# Altium PCB MotionControlBoard.PcbDoc
Units mil, origin at the board's own origin, x right, y up, seen from the top; angles counter-clockwise.
Board outline 3935 x 2660 mil, 2 copper layers (Top Layer, Bottom Layer), stack 21 mil thick; 72 components, 65 nets, 270 pads, 170 vias.
Unrouted connection lines stored in the file: 2.
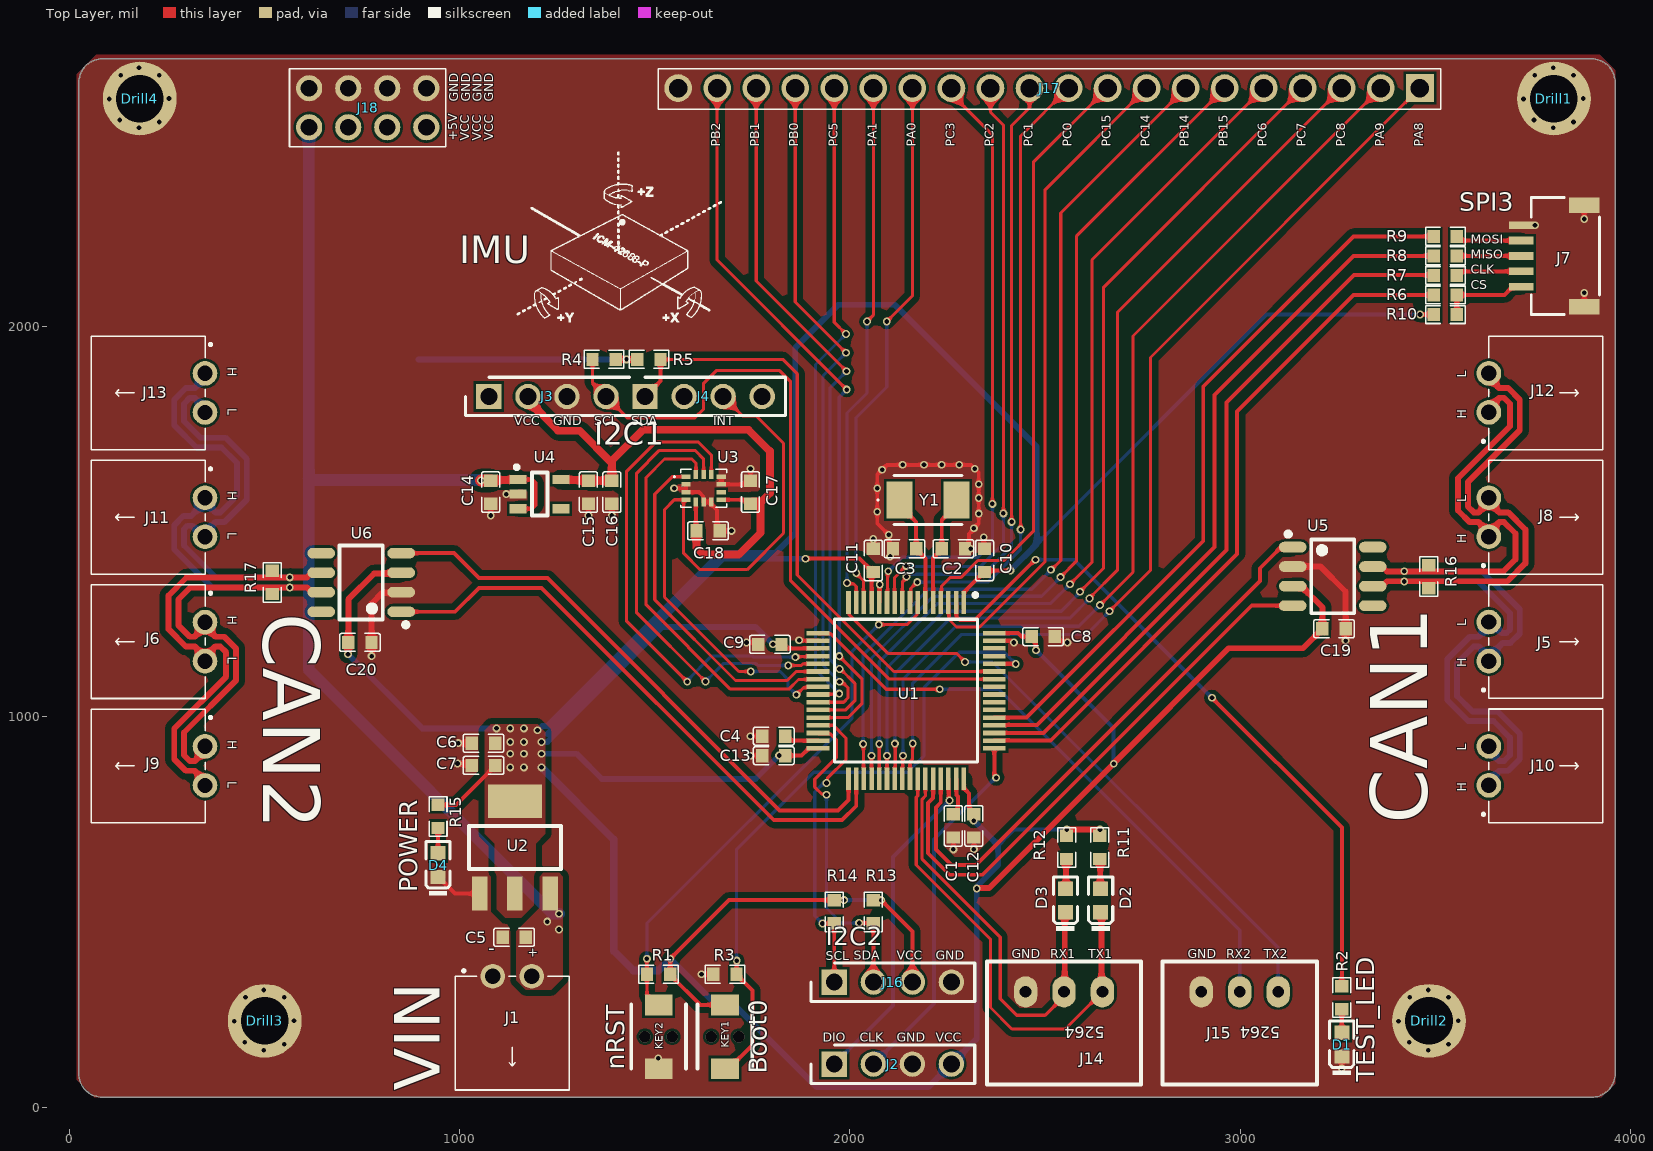
[diagram p0: Top Layer view]
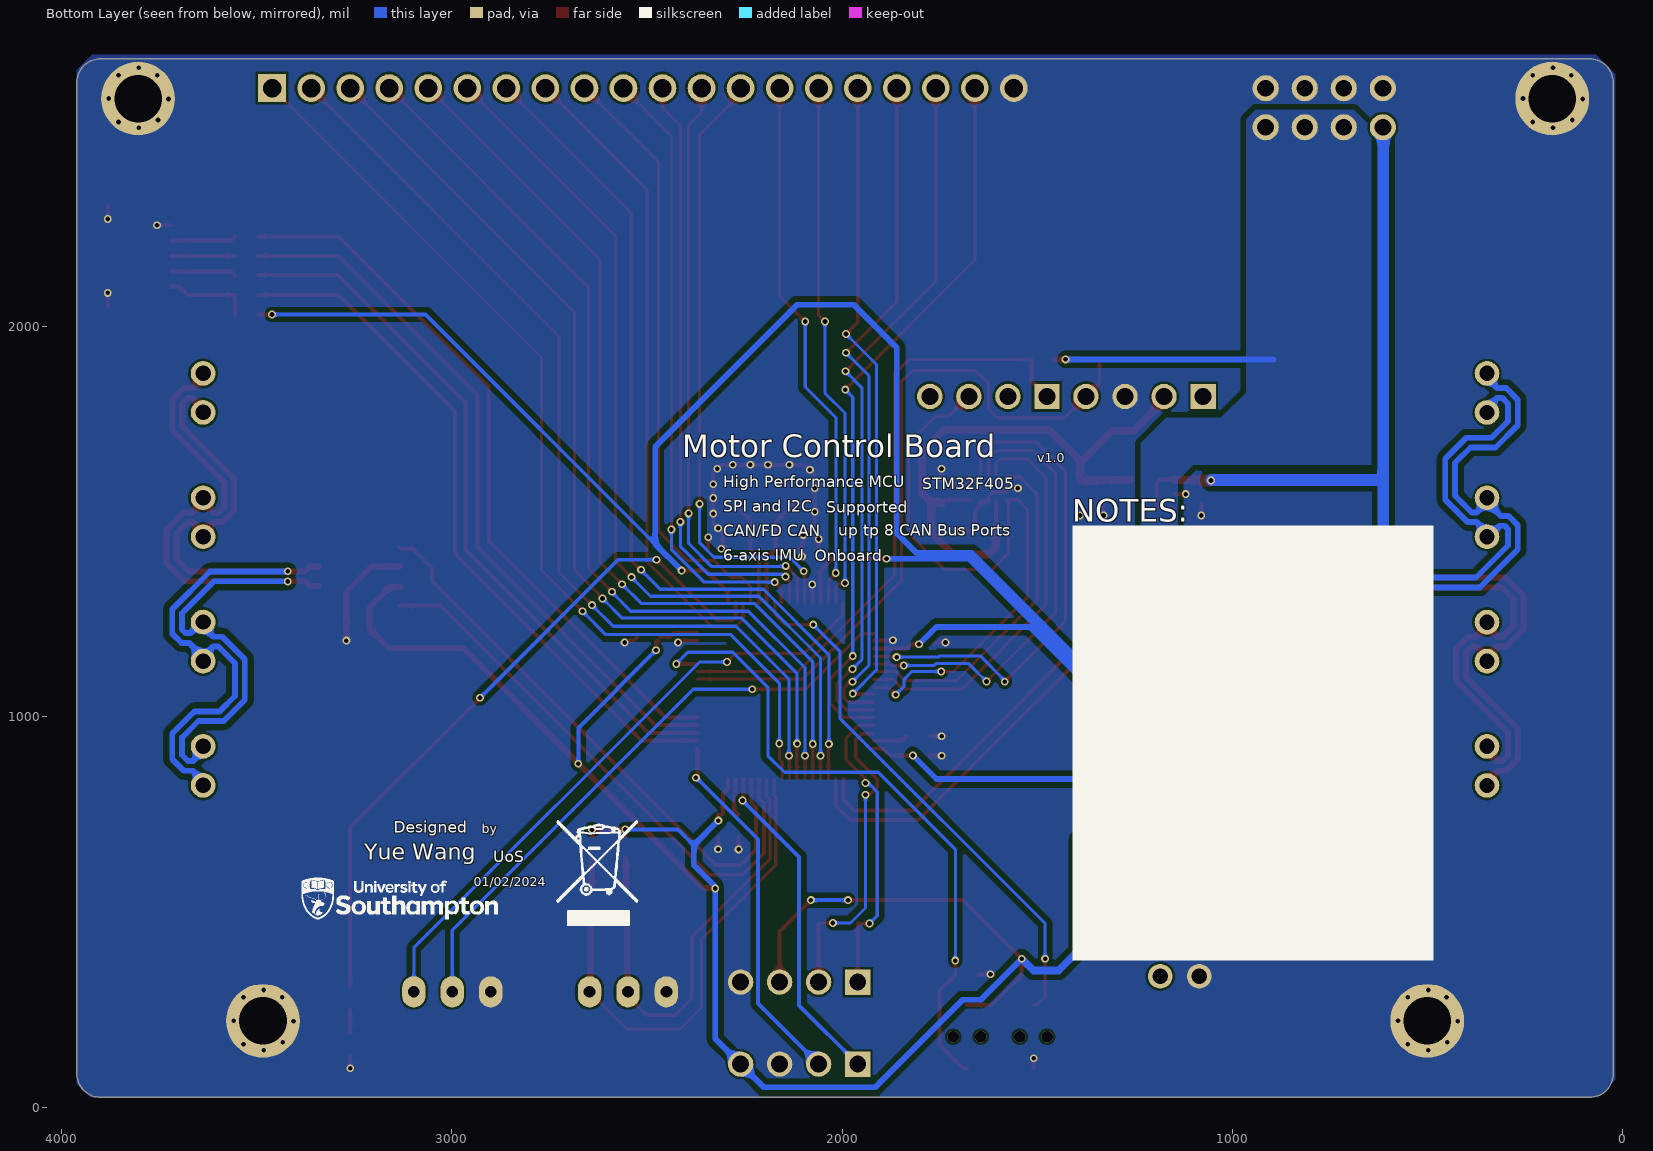
[diagram p1: Bottom Layer view, seen from below]
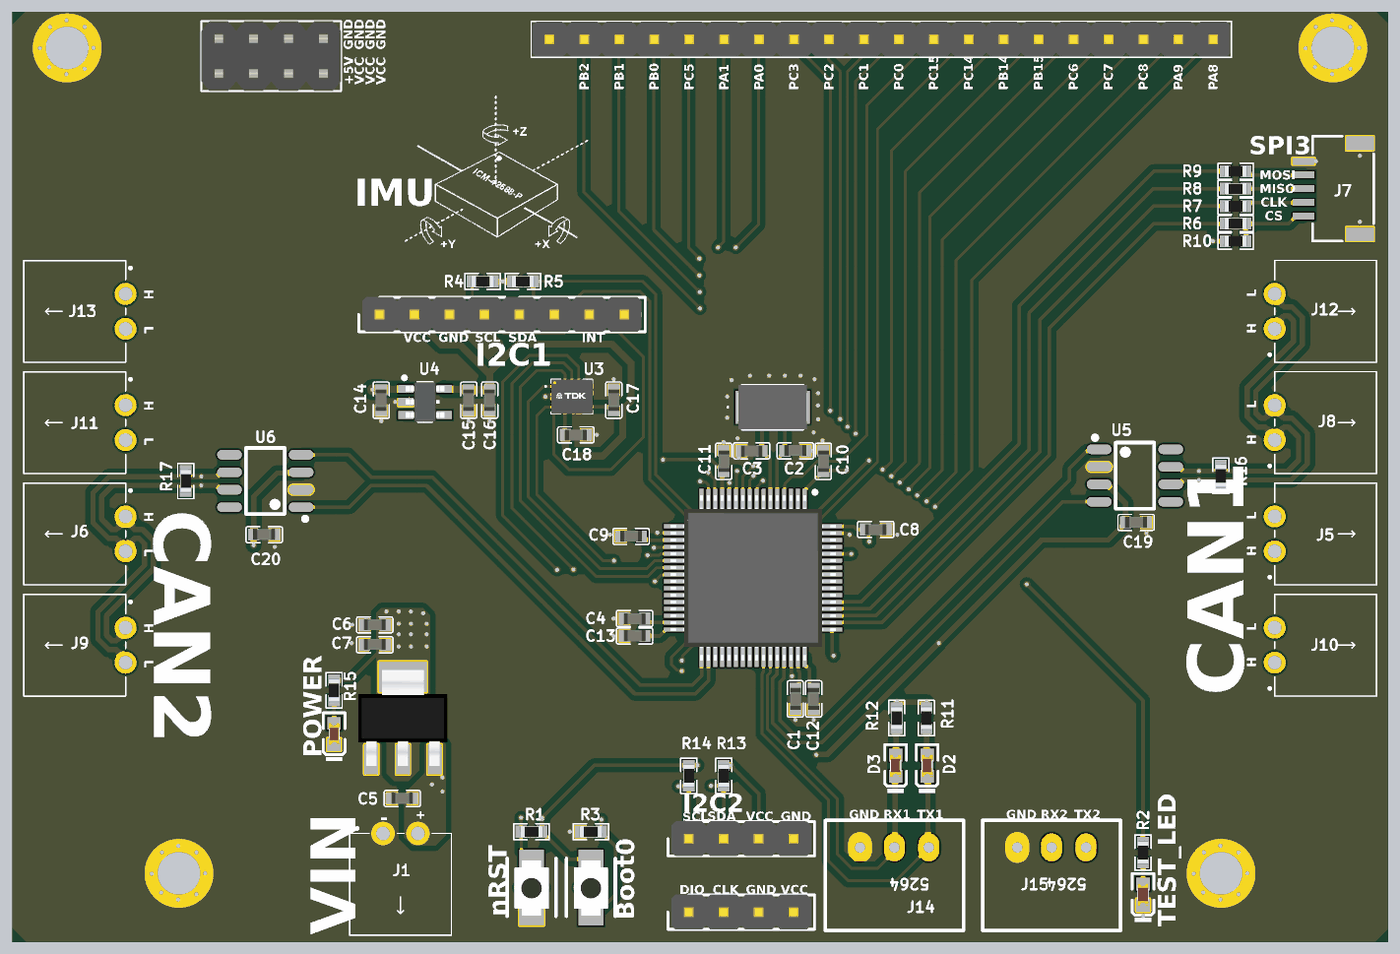
[diagram p2: 3D render of the assembled board from above, using the file's embedded part models]

## Layer stack, top to bottom
Top Solder: solder mask 0.4, Solder Resist, Dk 3.5
Top Layer: signal copper 1.4
Dielectric 2: prepreg 2.8, PP-006, Dk 4.1
Dielectric 1: dielectric 12.6, FR-4, Dk 4.8
Dielectric 3: prepreg 2.8, PP-006, Dk 4.1
Bottom Layer: signal copper 1.4
Board Layer Stack Bottom Solder: solder mask 0.4, Solder Resist, Dk 3.5

## Board outline
25,85 25,2625 cw(c85,2625) 85,2685 3900,2685 cw(c3900,2625) 3960,2625 3960,85 cw(c3900,85) 3900,25 85,25 cw(c85,85)

## Design rules (kind name [scope] priority, off if disabled: settings)
Clearance [All] p1: gap=6 ignorepadtopadclearanceinfootprint=FALSE except(15: Track-Poly Poly-Poly)
DiffPairsRouting [All] p1: maxlimit=10 minlimit=10 mostfreqgap=10 toplayer_minwidth=15 toplayer_maxwidth=15 toplayer_prefwidth=15 bottomlayer_minwidth=15 bottomlayer_maxwidth=15 bottomlayer_prefwidth=15 maxuncoupledlength=500
MinimumSolderMaskSliver [All] p1: minsoldermaskwidth=4
PlaneConnect [All] p1: planeconnectstyle=Direct reliefexpansion=20 reliefentries=4 reliefconductorwidth=10 reliefairgap=10
PolygonConnect [All] p1: connectstyle=Direct reliefconductorwidth=10 reliefentries=4 polygonreliefangle="90 Angle" airgapwidth=10
RoutingVias [All] p1: holewidth=12 width=20 viastyle="Through Hole" minholewidth=12 minwidth=20 maxholewidth=80 maxwidth=100
SilkToSilkClearance [All] p1: silktosilkclearance=0
SilkToSolderMaskClearance [IsPad] p1: minsilkscreentomaskgap=2 clearancetoexposedcopper=TRUE
SolderMaskExpansion [All] p1: expansion=4 istentingtop=FALSE
Width [All] p1: maxlimit=100 minlimit=6 preferedwidth=10
25 further rules are at their usual default settings.

## Classes and differential pairs
differential pair class CAN: CAN1 CAN2
net class CAN: CAN1_H CAN1_L CAN1_RX CAN1_TX CAN2_H CAN2_L CAN2_RX CAN2_TX
component class Peripherals: C19 C20 D2 D3 Drill1 Drill2 Drill3 Drill4 J5 J6 J7 J8 J9 J10 J11 J12 J13 J14 J15 J16 J17 J18 R6 R7 R8 R9 R10 R11 R12 R13 R14 R17 U5 U6
component class IMU: C14 C15 C16 C17 C18 J3 J4 R4 R5 U3 U4
component class Core: C1 C2 C3 C4 C5 C6 C7 C8 C9 C10 C11 C12 C13 D1 D4 J1 J2 KEY1 KEY2 R1 R2 R3 R15 U1 U2 Y1
differential pair CAN2: +CAN2_H -CAN2_L
differential pair CAN1: +CAN1_H -CAN1_L

## Components (designator, comment, footprint, x,y, rotation, side; value= is the part's Value field where it differs from the comment)
C1 "2.2uF" C0603 2265,720 r270 top
C2 "20pF" C0603 2265,1430 r0 top
C3 "20pF" C0603 2140,1430 r180 top
C4 "2.2uF" C0603 1805,950 r180 top
C5 "0.1uF" C0603 1140,435 r0 top
C6 "1uF" C0603 1061.49,931.8 r0 top
C7 "0.1uF" C0603 1061.49,875 r0 top
C8 "0.1uF" C0603 2495,1205 r180 top
C9 "0.1uF" C0603 1795,1185 r0 top
C10 "0.1uF" C0603 2345,1400 r270 top
C11 "0.1uF" C0603 2060,1400 r270 top
C12 "0.1uF" C0603 2317.53,720.09 r90 top
C13 "0.1uF" C0603 1805,900 r0 top
C14 "1uF" C0603 1080,1575 r90 top
C15 "1uF" C0603 1330.33,1575 r90 top
C16 "0.1uF" C0603 1390.33,1575 r90 top
C17 "0.1uF" C0603 1745.33,1575 r270 top
C18 "10nF" C0603 1636.67,1475.77 r180 top
C19 "0.1uF" C0603 3240,1225 r0 top
C20 "0.1uF" C0603 745,1190 r0 top
D1 "LED" 0603_LED_S1 3260,160 r90 top
D2 "LED" 0603_LED_S1 2642.22,529.04 r90 top
D3 "LED" 0603_LED_S1 2552.15,529.04 r90 top
D4 "LED" 0603_LED_S1 945,619.68 r90 top
Drill1 "Drill_M3" Drill_M_3 3803.2,2583.05 r270 top
Drill2 "Drill_M3" Drill_M_3 3483.32,220.84 r270 top
Drill3 "Drill_M3" Drill_M_3 501.04,220.84 r270 top
Drill4 "Drill_M3" Drill_M_3 181.16,2583.05 r270 top locked
J1 "XH_2.54mm_1x2P" XH2.54mm1x2P弯插 1135,335 r0 top
J2 "Header1x4" "Header 1x4p" 1960,110 r0 top
J3 "Header1x4" "Header 1x4p" 1075.33,1820 r0 top
J4 "Header1x4" "Header 1x4p" 1475.33,1820 r0 top
J5 "XH_2.54mm_1x2P" XH2.54mm1x2P弯插 3636.73,1192.29 r90 top
J6 "XH_2.54mm_1x2P" XH2.54mm1x2P弯插 348.27,1192.18 r270 top
J7 "1*5P" 1.0T-5P 3880,2050 r90 top
J8 "XH_2.54mm_1x2P" XH2.54mm1x2P弯插 3636.73,1510.72 r90 top
J9 "XH_2.54mm_1x2P" XH2.54mm1x2P弯插 348.27,873.75 r270 top
J10 "XH_2.54mm_1x2P" XH2.54mm1x2P弯插 3636.73,873.85 r90 top
J11 "XH_2.54mm_1x2P" XH2.54mm1x2P弯插 348.27,1510.62 r270 top
J12 "XH_2.54mm_1x2P" XH2.54mm1x2P弯插 3636.73,1829.16 r90 top
J13 "XH_2.54mm_1x2P" XH2.54mm1x2P弯插 348.27,1829.06 r270 top
J14 "5263-3AW" 5264-3AW 2548.43,291.35 r180 top
J15 "5263-3AW" 5264-3AW 2998.43,291.35 r180 top
J16 "Header1x4" "Header 1x4p" 1960,320 r0 top
J17 "Header1x20" Header1x20 2510,2610 r180 top
J18 "Header2*4" Header2*4 765,2559.61 r0 top
KEY1 "BOOT" KEY_3*4 1680,98.31 r90 top
KEY2 "nRST" KEY_3*4 1510,98.31 r90 top
R1 "10kΩ" R0603 1510,340 r0 top
R2 "330Ω" R0603 3260,280 r270 top
R3 "10kΩ" R0603 1680,340 r0 top
R4 "2.2kΩ" R0603 1370.33,1915 r0 top
R5 "2.2kΩ" R0603 1485.33,1915 r180 top
R6 "22Ω" R0603 3525,2080 r180 top
R7 "22Ω" R0603 3525,2130 r180 top
R8 "22Ω" R0603 3525,2180 r180 top
R9 "22Ω" R0603 3525,2230 r180 top
R10 "22Ω" R0603 3525,2030 r180 top
R11 "2.2kΩ" R0603 2640,665 r270 top
R12 "2.2kΩ" R0603 2555,665 r270 top
R13 "2.2kΩ" R0603 2060,500 r90 top
R14 "2.2kΩ" R0603 1960,500 r90 top
R15 "330Ω" R0603 945,744.37 r270 top
R16 "120Ω" R0603 3482.71,1358.33 r270 top
R17 "120Ω" R0603 520.39,1343.67 r90 top
U1 "STM32F405RGT6" QFP50P1200X1200X160-64N 2144.09,1066.42 r270 top
U2 "AMS1117-3.3" SOT-223 1140,665 r90 top
U3 "ICM-42688-P" IIM42352 1625.33,1585 r0 top
U4 "ME6211C33M5G-N" SOT-23-5 1205.33,1570 r180 top
U5 "SN65HVD232DR" SOIC-8_150mil 3236.25,1359.23 r270 top
U6 "SN65HVD232DR" SOIC-8_150mil 748.75,1343.67 r90 top
Y1 "8MHz ±10ppm 20pF YSX530GA" X503212MSB2GI 2200,1555 r0 top

## Footprints (in the part's own frame and the unit in brackets; to place one, negate y for a bottom-side part, rotate by r counter-clockwise, add the part's x,y. Pads: shape width x height; smd on the part's side, far side on the other; paste and mask are expansions set on the pad)
1.0T-5P [mm]
  rect 1x2 smd: 0(0.002,-0.018) 0(6.602,-0.018)
  rect 0.5x1.6 smd: 1(1.302,4.082) 2(2.302,4.082) 3(3.302,4.082) 4(4.302,4.082) 5(5.302,4.082)
  silkscreen extent -0.51,-1.02 7.11,3.43
0603_LED_S1 [mm]
  rect 0.93x0.98 smd: A(0.77,0) K(-0.77,0)
  silkscreen extent -1.97,-0.79 1.54,0.79, body extent -0.8,-0.4 0.8,0.4, height 0.6
5264-3AW [mil]
  oval 60x80 hole 30: 1(-98.42,-3.65) 2(0,-3.65) 3(98.43,-3.65)
  silkscreen extent -198,-81 198,234
C0603 [mil]
  rect 31.73x34.02 smd mask+2.01: 1(-29.67,0) 2(29.67,0)
  silkscreen extent -52,-23 52,23, body extent -31,-15 31,16, height 18
Drill_M_3 [mm]
  round 4.8 hole 3.1: 0(0,0)
Header1x20 [mil]
  rect 70.91x70.91 hole 47.2 mask+2.01: 1(-950,0)
  round 70.91 hole 47.2 mask+2.01: 2(-850,0) 3(-750,0) 4(-650,0) 5(-550,0) 6(-450,0) 7(-350,0) 8(-250,0) 9(-150,0) 10(-50,0) 11(50,0) 12(150,0) 13(250,0) 14(350,0) 15(450,0) 16(550,0) 17(650,0) 18(750,0) 19(850,0) 20(950,0)
  silkscreen extent -1003,-50 1001,54, body extent -1001,-47 999,53, height 335
Header2*4 [mm]
  round 1.699 hole 1.1: 1(-3.81,-1.27) 2(-3.81,1.27) 3(-1.27,-1.27) 4(-1.27,1.27) 5(1.27,-1.27) 6(1.27,1.27) 7(3.81,-1.27) 8(3.81,1.27)
  silkscreen extent -5.08,-2.54 5.08,2.54, body extent -5.08,-2.54 5.08,2.54, height 8.64
"Header 1x4p" [mm]
  rect 1.65x1.65 hole 1.1: 1(0,0)
  round 1.65 hole 1.1: 2(2.54,0) 3(5.08,0) 4(7.62,0)
  silkscreen extent -1.52,-1.25 9.14,1.25, body extent -1.28,-1.27 8.9,1.27, height 8.6
IIM42352 [mm]
  rect 0.6x0.3 smd: 1(-1.15,0.75) 2(-1.15,0.25) 3(-1.15,-0.25) 4(-1.15,-0.75) 8(1.15,-0.75) 9(1.15,-0.25) 10(1.15,0.25) 11(1.15,0.75)
  rect 0.3x0.6 smd: 5(-0.5,-0.9) 6(0,-0.9) 7(0.5,-0.9) 12(0.5,0.9) 13(0,0.9) 14(-0.5,0.9)
  silkscreen extent -1.95,-1.25 1.5,1.25, body extent -1.5,-1.25 1.5,1.25, height 0.9
KEY_3*4 [mm]
  rect 1.35x1.8 smd: 1(0,0) 2(4.15,0)
  silkscreen extent 0,-1.77 4.19,1.78, body extent 0.03,-1.25 4.03,1.25, height 1.6
QFP50P1200X1200X160-64N [mm]
  rect 1.475x0.3 smd: 1(-5.738,3.75) 2(-5.738,3.25) 3(-5.738,2.75) 4(-5.738,2.25) 5(-5.738,1.75) 6(-5.738,1.25) 7(-5.738,0.75) 8(-5.738,0.25) 9(-5.738,-0.25) 10(-5.738,-0.75) 11(-5.738,-1.25) 12(-5.738,-1.75) 13(-5.738,-2.25) 14(-5.738,-2.75) 15(-5.738,-3.25) 16(-5.738,-3.75) 33(5.738,-3.75) 34(5.738,-3.25) 35(5.738,-2.75) 36(5.738,-2.25) 37(5.738,-1.75) 38(5.738,-1.25) 39(5.738,-0.75) 40(5.738,-0.25) 41(5.738,0.25) 42(5.738,0.75) 43(5.738,1.25) 44(5.738,1.75) 45(5.738,2.25) 46(5.738,2.75) 47(5.738,3.25) 48(5.738,3.75)
  rect 0.3x1.475 smd: 17(-3.75,-5.738) 18(-3.25,-5.738) 19(-2.75,-5.738) 20(-2.25,-5.738) 21(-1.75,-5.738) 22(-1.25,-5.738) 23(-0.75,-5.738) 24(-0.25,-5.738) 25(0.25,-5.738) 26(0.75,-5.738) 27(1.25,-5.738) 28(1.75,-5.738) 29(2.25,-5.738) 30(2.75,-5.738) 31(3.25,-5.738) 32(3.75,-5.738) 49(3.75,5.738) 50(3.25,5.738) 51(2.75,5.738) 52(2.25,5.738) 53(1.75,5.738) 54(1.25,5.738) 55(0.75,5.738) 56(0.25,5.738) 57(-0.25,5.738) 58(-0.75,5.738) 59(-1.25,5.738) 60(-1.75,5.738) 61(-2.25,5.738) 62(-2.75,5.738) 63(-3.25,5.738) 64(-3.75,5.738)
  silkscreen extent -6.35,-4.65 4.65,4.65, body extent -6,-6 6,6, height 1.6
R0603 [mil]
  rect 31.73x34.02 smd mask+2.01: 1(-29.67,0) 2(29.67,0)
  silkscreen extent -51,-23 50,23, body extent -37,-16 37,16, height 18
SOIC-8_150mil [mm]
  oval 0.7x1.8 smd: 1(-1.905,-2.586) 2(-0.635,-2.586) 3(0.635,-2.586) 4(1.905,-2.586) 5(1.905,2.614) 6(0.635,2.614) 7(-0.635,2.614) 8(-1.905,2.614)
  silkscreen extent -2.9,-3.04 2.4,1.41
SOT-23-5 [mm]
  rect 1.1x0.6 smd: 1(1.4,-0.95) 2(1.4,0) 3(1.4,0.95) 4(-1.4,0.95) 5(-1.4,-0.95)
  silkscreen extent -0.5,-1.87 1.62,1.4, body extent -1.4,-1.45 1.4,1.45, height 1.2
SOT-223 [mm]
  rect 2.2x1 smd: 1(-3,2.249) 2(-3,-0.051) 3(-3,-2.351)
  rect 2.2x3.5 smd: 2(3,-0.051)
  silkscreen extent -1.4,-3.05 1.4,2.95, body extent -3.49,-3.29 3.49,3.19, height 1.64
X503212MSB2GI [mm]
  rect 1.7x2.4 smd: 1(-1.85,0) 2(1.85,0)
  silkscreen extent -3.3,-1.6 2.2,1.6, body extent -2.53,-1.6 2.53,1.6, height 1.45
XH2.54mm1x2P弯插 [mm]
  round 1.6 hole 1.001 mask+0.051: 1(-1.27,0) 2(1.27,0)
  silkscreen extent -3.7,-7.4 3.7,0.43, body extent -3.75,-7.39 3.75,0.33, height 5.9

## Part data
C1 C2 C3 C4 C5 C6 C7 C8 C9 C10 C11 C12 C13 C14 C15 C16 C17 C18 C19 C20: library part Capacitor
D1 D2 D3 D4: library part "0603 红灯", "发光二极管", Package=0603, SuppliersPartNumber=C2286, ComponentLink1Description=供应商链接, ComponentLink1URL=http://www.szlcsc.com/product/details_2659.html, Supplier=LC
J7: library part "插座 1*5P 卧贴", "C145957"
J18: "C124386"
KEY1 KEY2: library part KEY_3*4, "C707339"
R1 R2 R3 R4 R5 R6 R7 R8 R9 R10 R11 R12 R13 R14 R15 R16 R17: library part Resistor
U1: library part STM32F405RGT6TR, "Integrated Circuit", Manufacturer_Name=STMicroelectronics, Mouser Part Number=511-STM32F405RGT6TR, Arrow Part Number=STM32F405RGT6TR, Arrow Price/Stock=https://www.arrow.com/en/products/stm32f405rgt6tr/stmicroelectronics?region=nac, Datasheet Link=http://www.st.com/web/en/resource/technical/document/datasheet/DM00037051.pdf, Height=1.6mm, Manufacturer_Part_Number=STM32F405RGT6TR, Mouser Price/Stock=https://www.mouser.co.uk/ProductDetail/STMicroelectronics/STM32F405RGT6TR?qs=MavH1QghrkHshpR6GkvPIg%3D%3D
U2: "C347222"
U3: "Integrated Circuit", Manufacturer_Name=TDK, Mouser Part Number=410-ICM-42688-P, Arrow Part Number=ICM-42688-P, Arrow Price/Stock=https://www.arrow.com/en/products/icm-42688-p/invensense?region=nac, Datasheet Link=https://3cfeqx1hf82y3xcoull08ihx-wpengine.netdna-ssl.com/wp-content/uploads/2021/06/DS-000347-ICM-42688-P-v1.5.pdf, Manufacturer_Part_Number=ICM-42688-P, Mouser Price/Stock=https://www.mouser.co.uk/ProductDetail/TDK-InvenSense/ICM-42688-P?qs=OlC7AqGiEDk8QrNAV728zw%3D%3D
U4: "C82942"
U5 U6: "C30530"
Y1: library part X503212MSB2GI, "Crystal or Oscillator", Manufacturer_Name="Yangxing Tech", Datasheet Link=https://datasheet.lcsc.com/szlcsc/Yangxing-Tech-X503212MSB2GI_C112573.pdf, Height=1.35mm, Manufacturer_Part_Number=X503212MSB2GI

## Via types
v1: diameter 20, hole 12, Top Layer to Bottom Layer, tented both sides, 166 vias
v2: diameter 29.53, hole 29.53, Top Layer to Bottom Layer, tented both sides, 4 vias

## Nets (pads, with @x,y where several pads share a name; then routed paths per layer and width w, separated by ;. In a path a pad name is that pad's centre, name@x,y a point inside that pad or via, vN(x,y) a via of type N, cw(c..) or ccw(c..) an arc to the next point about the centre after c; other vN are vias at no path point)
+5: C5.2 C14.2 J1.2 J18.1 U2.3 U4.1 U4.3 | length 2981.3
  Top Layer w10: U4.3 1185.64,1532.6 1195,1541.96 1195,1598.87 1186.47,1607.4 U4.1
  Top Layer w20: C14.2 1081.37,1606.03 1148.85,1606.03 U4.1
  Top Layer w30: v1(1055,1605) 1079.67,1605 C14.2
  Bottom Layer w30: J18.1@613.54,2508.15 613.54,1611.23 ; v1@1053.77,1606.23 618.54,1606.23 613.54,1611.23 ; v1(1255,495) 1238.23,495 613.54,1119.69 613.54,1611.23
  other v1: 1255,455 1225,475
BOOT0: KEY1.1 R3.2 U1.60 | length 1707
  Top Layer w8: R3.2@1709.67,338.86 1710,339.19 v1(1710,375)
  Top Layer w10: KEY1.1 1688.86,98.31 1750,159.45 1750,298.52 R3.2@1709.67,338.86 ; U1.60 2370.16,1135.16 2424.84,1135.16 v1(2425,1135)
  Bottom Layer w8: v1(1710,375) 1710,660 1907.5,857.5 2147.5,857.5 2190,900 2190,1075 2280,1165 2395,1165 v1(2425,1135)
CAN1_H: J5.1 J8.1 J10.1 J12.1 R16.1 U5.7 | length 2152.9
  Top Layer w15: U5.7 3363.38,1384.23 3375.88,1371.73 3419.5,1371.73 v1(3420,1372.23) 3423.54,1372.23 3424.04,1371.73 3673.83,1371.73 3705,1402.91 3705,1468.82 3675.59,1498.22 3663.17,1498.22 J8.1@3636.73,1471.79 ; J8.1 J8.1@3636.73,1471.79 ; J12.1 3636.73,1790.23 3663.17,1816.66 3675.59,1816.66 3690.73,1801.53 3690.73,1743.76 3557.74,1610.77 3557.74,1528 3587.51,1498.22 3610.3,1498.22 J8.1@3636.73,1471.79
  Bottom Layer w15: v1(3420,1372.23) 3423.54,1372.23 3424.04,1371.73 3619,1371.73 3715.73,1275.01 3715.73,1212.44 3692.3,1189.01 3672.39,1189.01 J5.1@3636.73,1153.35 ; J10.1 3636.73,834.92 3663.17,861.35 3685.95,861.35 3715.73,891.13 3715.73,956.57 3658.72,1013.58 3594.33,1013.58 3555,1052.91 3555,1136.92 3597.87,1179.79 3610.3,1179.79 J5.1@3636.73,1153.35 ; J5.1 J5.1@3636.73,1153.35
CAN1_L: J5.2 J8.2 J10.2 J12.2 R16.2 U5.6 | length 2149.8
  Top Layer w15: U5.6 3363.38,1334.23 3375.88,1346.73 3415.96,1346.73 3416.46,1346.23 v1(3420,1346.23) 3420.5,1346.73 3684.18,1346.73 3730,1392.55 3730,1479.17 3685.95,1523.22 3663.17,1523.22 J8.2@3636.73,1549.66 ; J8.2 J8.2@3636.73,1549.66 ; J12.2 3636.73,1868.1 3663.17,1841.66 3685.95,1841.66 3715.73,1811.88 3715.73,1733.41 3582.74,1600.41 3582.74,1538.36 3597.87,1523.22 3610.3,1523.22 J8.2@3636.73,1549.66
  Bottom Layer w15: v1(3420,1346.23) 3420.5,1346.73 3608.65,1346.73 3690.73,1264.65 3690.73,1222.8 3681.94,1214.01 3669.52,1214.01 3641.24,1242.29 J5.2 3636.73,1231.22 3610.3,1204.79 3587.51,1204.79 3530,1147.27 3530,1042.55 3583.97,988.58 3648.37,988.58 3690.73,946.22 3690.73,901.49 3675.59,886.35 3663.17,886.35 3636.73,912.79 J10.2
CAN1_RX: U1.44 U5.4 | length 1438.6
  Top Layer w10: U1.44 2212.99,792.06 2200,779.07 2200,650 2255,595 2339.93,595 3029.16,1284.23 U5.4
CAN1_TX: U1.45 U5.1 | length 1472.8
  Top Layer w10: U1.45 2232.68,779.73 2220.59,767.64 2220.59,659.55 2260.13,620 2322.96,620 3050,1347.04 3050,1380 3100.11,1430.11 3130.31,1430.11 U5.1
CAN2_H: J6.1 J9.1 J11.1 J13.1 R17.1 U6.7 | length 2152.9
  Top Layer w15: J9.1 348.27,912.68 321.83,886.25 309.41,886.25 294.27,901.38 294.27,959.15 427.26,1092.14 427.26,1174.9 397.49,1204.68 374.7,1204.68 J6.1@348.27,1231.12 ; J6.1 J6.1@348.27,1231.12 ; U6.7 621.62,1318.67 609.12,1331.17 565.5,1331.17 v1(565,1330.67) 561.46,1330.67 560.96,1331.17 311.17,1331.17 280,1300 280,1234.09 309.41,1204.68 321.83,1204.68 J6.1@348.27,1231.12
  Bottom Layer w15: J11.1 J11.1@348.27,1549.55 ; J13.1 348.27,1867.99 321.83,1841.56 299.05,1841.56 269.27,1811.78 269.27,1746.33 326.28,1689.33 390.67,1689.33 430,1650 430,1565.99 387.13,1523.12 374.7,1523.12 J11.1@348.27,1549.55 ; v1(565,1330.67) 561.46,1330.67 560.96,1331.17 366,1331.17 269.27,1427.9 269.27,1490.47 292.7,1513.9 312.61,1513.9 J11.1@348.27,1549.55
CAN2_L: J6.2 J9.2 J11.2 J13.2 R17.2 U6.6 | length 2149.8
  Top Layer w15: J9.2 348.27,834.81 321.83,861.25 299.05,861.25 269.27,891.03 269.27,969.5 402.26,1102.49 402.26,1164.55 387.13,1179.68 374.7,1179.68 J6.2@348.27,1153.25 ; J6.2 J6.2@348.27,1153.25 ; U6.6 621.62,1368.67 609.12,1356.17 569.04,1356.17 568.54,1356.67 v1(565,1356.67) 564.5,1356.17 300.82,1356.17 255,1310.36 255,1223.73 299.05,1179.68 321.83,1179.68 J6.2@348.27,1153.25
  Bottom Layer w15: J13.2 348.27,1790.12 321.83,1816.56 309.41,1816.56 294.27,1801.42 294.27,1756.69 336.63,1714.33 401.03,1714.33 455,1660.36 455,1555.63 397.48,1498.12 374.7,1498.12 348.27,1471.68 J11.2 343.76,1460.62 315.48,1488.9 303.06,1488.9 294.27,1480.11 294.27,1438.25 376.35,1356.17 564.5,1356.17 v1(565,1356.67)
CAN2_RX: U1.33 U6.4 | length 1483.7
  Top Layer w10: U6.4 986.33,1418.67 1050,1355 1225,1355 1820,760 1970,760 1996.46,786.46 U1.33
CAN2_TX: U1.34 U6.1 | length 1521.8
  Top Layer w10: U6.1 988.67,1268.67 1050,1330 1210,1330 1805,735 1980,735 2016.14,771.14 U1.34
GND: C1.2 C2.2 C3.2 C4.2 C5.1 C6.1 C7.1 C8.1 C9.1 C10.1 C11.1 C12.1 C13.1 C14.1 C15.1 C16.1 C17.1 C18.1 C19.2 C20.2 D1.K D4.K Drill1.0 Drill2.0 Drill3.0 Drill4.0 J1.1 J2.3 J3.3 J7.0 J7.5 J14.3 J15.3 J16.4 J17.20 J18.2 J18.4 J18.6 J18.8 KEY2.1 R3.1 U1.12 U1.18 U1.63 U2.1 U3.2 U3.3 U3.6 U3.7 U3.10 U3.11 U4.2 U5.2 U6.2 | length 2533.8
  Top Layer w10: D4.K 945.98,589.37 988.46,546.89 U2.1 ; v1(1080,1515) C14.1 ; v1(1119.88,1570) U4.2 ; v1(1330.33,1515) C15.1 ; v1(1390.33,1515) C16.1 ; v1(1509.26,125.15) 1509.26,99.04 KEY2.1 ; v1(1549.72,1585) 1580.06,1585 ; U3.2 1580.06,1585 ; v1(1620,340) R3.1 ; U3.11 U3.10 1735.51,1594.84 C17.1 v1(1745.33,1635) ; v1(1696.67,1475.77) C18.1 1660,1482.1 1660,1528.68 1645.02,1543.66 U3.7 U3.6 1624.43,1550.47 1624.43,1564.06 1613.33,1575.16 U3.3 1580.06,1585 ; v1(1735,1190.12) 1760.21,1190.12 C9.1 ; v1(1745,900) C13.1 ; v1(1745,950) C4.2 ; v1(1870,1195.68) 1870.66,1195.03 1917.53,1195.03 U1.18 ; C11.1 v1(2060,1455) ; U1.12@2075.85,1292.98 2075.85,1337.81 v1(2076.51,1338.47) ; v1(2102.96,1410.06) 2102.96,1422.63 C3.2 2099.47,1440.87 v1(2099.47,1465.53) 2070,1495 2070,1620 2095,1645 2310,1645 2330,1625 2330,1495 v1(2317.5,1482.5) 2317.5,1479.79 2305.53,1467.83 2305.53,1440.87 C2.2 ; v1(2265,660) C1.2 ; C2.2@2294.67,1430.2 v1(2309.75,1430.2) ; v1(2317.53,660.09) C12.1 ; v1(2342.74,1459.58) 2342.74,1431.93 C10.1 ; U1.63 2412.92,1194.37 2417.29,1190 v1(2420,1190) ; C8.1 2524.67,1203.86 2535.53,1192.99 2551.35,1192.99 2554.27,1190.08 v1(2556.97,1190.08) ; v1(3260,99.35) D1.K ; J7.5 v1(3754.63,2258.74) ; J7.0@3880.71,2050.08 v1(3880.71,2085.41) ; v1(3880.71,2274.59) J7.0@3880.71,2309.92
  Top Layer w15: v1(775,1155) 774.83,1155.17 774.83,1189.83 C20.2 775,1190.33 775,1290 802,1317 852.24,1317 U6.2 ; v1(995.11,880.07) 996.07,879.12 1027.71,879.12 C7.1 ; v1(996.83,932.13) 997,931.97 1031.66,931.97 C6.1 ; U5.2@3132.03,1386.64 3133.67,1385 3205,1385 3269.67,1320.33 C19.2 v1(3269.67,1194.67)
  other v1: 499.04,145.84 3481.32,145.84 551.04,160.84 3533.32,160.84 450.04,165.84 3432.32,165.84 423.04,219.84 3405.32,219.84 576.04,220.84 3558.32,220.84 452.04,280.84 551.04,280.84 3434.32,280.84 3533.32,280.84 499.04,299.84 3481.32,299.84 2330,1520 2070,1525 2330,1560 2070,1585 2330,1595 2082.5,1632.5 2320,1635 2135,1645 2190,1645 2235,1645 2280,1645 179.16,2508.05 3801.2,2508.05 231.16,2523.05 3853.2,2523.05 130.16,2528.05 3752.2,2528.05 103.16,2582.05 3725.2,2582.05 256.16,2583.05 3878.2,2583.05 132.16,2643.05 231.16,2643.05 3754.2,2643.05 3853.2,2643.05 179.16,2662.05 3801.2,2662.05
I2C1_SCL: J3.4 R4.1 U1.58 | length 1841
  Top Layer w8: R4.1 1340.67,1854.67 J3.4 1429.67,1765.67 1602.91,1765.67 1625.33,1788.09 1625.33,1853.94 1657.6,1886.2 1819.88,1886.2 1848.15,1857.93 1848.15,1348.21 2100.41,1095.94 U1.58
I2C1_SDA: J4.1 R5.1 U1.59 | length 1599.2
  Top Layer w8: R5.1 1828.15,1915 1865.27,1877.88 1865.27,1362.91 2112.55,1115.63 U1.59
  Top Layer w10: J4.1 1515,1859.67 R5.1
I2C2_SCL: J16.1 R14.1 U1.29 | length 786.4
  Top Layer w8: U1.29 1957.17,977.83 1990,945 1990,890 1942.3,842.3 1942.3,832.3 v1(1940,830) ; v1(1930,470) 1959.67,470 R14.1
  Top Layer w10: J16.1 R14.1
  Bottom Layer w8: v1(1930,470) 1910,490 1910,807.03 1930.67,827.7 1937.7,827.7 v1(1940,830)
I2C2_SDA: J16.2 R13.1 U1.30 | length 812.9
  Top Layer w8: U1.30 1920.09,956.24 1949.49,956.24 1965,940.74 1965,895 1910,840 1910,819.41 1927.15,802.26 1937.74,802.26 v1(1940,800) ; v1(2023.62,471.51) 2058.83,471.51 R13.1
  Top Layer w10: J16.2 R13.1
  Bottom Layer w8: v1(1940,800) 1940,510 1978.49,471.51 v1(2023.62,471.51)
IMU_INT: J4.3 U1.24 U3.4 | length 1688.3
  Top Layer w6: U1.24@1917.28,1075.35 U1.24
  Top Layer w8: U3.4 U3.4@1574.15,1555.47 ; J4.3 1725.33,1770 1760,1770 1830,1700 1830,1470 1736.64,1376.64 1616.12,1376.64 1574.15,1418.61 U3.4@1574.15,1555.47 ; v1(1745.97,1115.63) 1715.61,1115.63 1525,1306.24 1525,1530 1550.47,1555.47 U3.4@1574.15,1555.47 ; v1(1862.86,1056.12) 1881.1,1074.35 1916.28,1074.35 U1.24@1917.28,1075.35
  Bottom Layer w8: v1(1745.97,1115.63) 1821.48,1115.63 1841.02,1096.08 1841.02,1077.96 v1(1862.86,1056.12)
IMU_VCC: C15.2 C16.2 C17.2 C18.2 J3.2 U3.5 U3.8 U4.5 | length 1563.6
  Top Layer w10: C18.2@1605.65,1484.98 1605.65,1517.27 U3.5 ; U3.8 1735.2,1555.47 C17.2
  Top Layer w20: J3.2 1175.33,1809.67 1252.68,1732.32 1307.68,1732.32 1390.33,1649.67 ; U4.5 1261.82,1606.03 1328.97,1606.03 C15.2 C16.2 1390.33,1649.67 ; C18.2 1607.01,1432.99 1625,1415 1715,1415 1771.23,1471.23 1771.23,1551.2 ; C17.2 1751.2,1551.2 1771.23,1551.2 ; 1390.33,1649.67 1390.33,1655.33 1470,1735 1740,1735 1795,1680 1795,1572.11 1774.09,1551.2 1771.23,1551.2
NetC1_1: C1.1 U1.47 | length 97.3
  Top Layer w10: C1.1@2266.14,749.67 2276.89,760.41 2276.89,795.82 2272.95,799.75 2272.95,839.61 U1.47
NetC4_1: C4.1 U1.31 | length 88.7
  Top Layer w10: C4.1 1834.67,949.33 1845.53,938.46 U1.31
NetD1_A: D1.A R2.2 | length 60
  Top Layer w10: D1.A R2.2
NetD2_A: D2.A R11.2 | length 76.9
  Top Layer w15: R11.2 2641.11,634.22 2641.11,560.47 D2.A
NetD3_A: D3.A R12.2 | length 77.2
  Top Layer w15: D3.A 2553.57,560.78 2553.57,633.91 R12.2
NetD4_A: D4.A R15.2 | length 64.7
  Top Layer w10: D4.A R15.2
NetJ7_1: J7.1 R6.1 R10.1 | length 223.4
  Top Layer w10: R10.1 R6.1 3676.38,2080 3697.64,2101.26 J7.1
NetJ7_2: J7.2 R7.1 | length 169
  Top Layer w10: R7.1 3565.3,2140.63 J7.2
NetJ7_3: J7.3 R8.1 | length 164.6
  Top Layer w10: R8.1 J7.3
NetJ7_4: J7.4 R9.1 | length 169
  Top Layer w10: R9.1 3565.3,2219.37 J7.4
nRST: KEY2.2 R1.1 U1.7 | length 1377.4
  Top Layer w8: v1(1480,380) 1480,340.33 R1.1 1480.33,283.27 1501.91,261.69 KEY2.2 ; v1(2074.13,1235.7) 2146.4,1235.7 2171.72,1261.02 2171.72,1290.42 U1.7
  Bottom Layer w8: v1(1480,380) 1480,470 2005,995 2005,1166.57 v1(2074.13,1235.7)
OSC_IN: C2.1 U1.5 Y1.2 | length 287.5
  Top Layer w10: U1.5 2212.99,1406.52 2235.33,1428.86 C2.1 2235.33,1503.72 2272.83,1541.22 Y1.2
OSC_OUT: C3.1 U1.6 Y1.1 | length 290.1
  Top Layer w10: Y1.1 2127.17,1541.22 2169.67,1498.72 C3.1 2169.67,1428.86 2193.31,1405.22 U1.6
PA0: J17.14 U1.14 | length 1385.5
  Top Layer w8: v1(2016.09,1367.71) 2016.09,1367.23 2034.59,1348.72 2034.59,1293.56 U1.14 ; v1(2094.48,2011.98) 2160,2077.5 J17.14
  Bottom Layer w8: v1(2016.09,1367.71) 2016.09,1766.09 2094.48,1844.48 v1(2094.48,2011.98)
PA1: J17.15 U1.15 | length 1363.8
  Top Layer w8: v1(1992.6,1342.48) 1994.9,1340.18 2009.32,1340.18 2016.14,1333.36 U1.15 ; v1(2043.66,2011.98) 2060,2028.31 J17.15
  Bottom Layer w8: v1(1992.6,1342.48) 1992.6,1777.6 2043.66,1828.66 v1(2043.66,2011.98)
PA8: J17.1 U1.41 | length 2497.9
  Top Layer w8: U1.41 2153.94,884.86 2160.77,891.68 v1(2160.77,931.26) ; v1(2665,1270) 2770,1375 2770,1920 J17.1
  Bottom Layer w8: v1(2160.77,931.26) 2160.77,1085.77 2285.08,1210.08 2605.08,1210.08 v1(2665,1270)
PA9: J17.2 U1.40 | length 2461.7
  Top Layer w8: U1.40 2135.17,841.43 2135.17,899.02 v1(2136.09,899.94) ; v1(2640.49,1285.69) 2640.69,1285.69 2725,1370 2725,1975 J17.2
  Bottom Layer w8: v1(2136.09,899.94) 2136.09,1096.09 2271.64,1231.64 2586.44,1231.64 v1(2640.49,1285.69)
PB0: J17.17 U1.26 | length 1752.3
  Top Layer w8: J17.17 1860,2061.94 v1(1990.02,1931.92) ; U1.26 1983.85,1036.89 1995.2,1048.24 1995.2,1074.21 1982.43,1086.97 1975.78,1086.97 v1(1973.48,1089.27)
  Bottom Layer w8: v1(1973.48,1089.27) 1930.93,1131.83 1930.93,1872.82 v1(1990.02,1931.92)
PB1: J17.18 U1.27 | length 1814.7
  Top Layer w8: J17.18 1760,2115.88 v1(1991.27,1884.61) ; U1.27 1989.55,1017.2 2012.81,1040.47 2012.81,1085.23 1975.97,1122.08 v1(1973.39,1122.08)
  Bottom Layer w8: v1(1973.39,1122.08) 1949.43,1146.04 1949.43,1842.78 v1(1991.27,1884.61)
PB2: J17.19 U1.28 | length 1873.7
  Top Layer w8: J17.19 1660,2169.58 v1(1992.02,1837.56) ; U1.28 1995.02,997.52 2030.64,1033.14 2030.64,1096.92 v1(1972.6,1154.96)
  Bottom Layer w8: v1(1972.6,1154.96) 1972.6,1818.15 v1(1992.02,1837.56)
PB14: J17.7 U1.35 | length 2268.7
  Top Layer w8: v1(2033.84,929.68) 2034.83,928.69 2034.83,841.51 U1.35 ; v1(2514.74,1376.35) 2516.35,1376.35 2540,1400 2540,2290 J17.7
  Bottom Layer w8: v1(2033.84,929.68) 2033.84,1158.84 2201.16,1326.16 2466.16,1326.16 2514.74,1374.74 v1(2514.74,1376.35)
PB15: J17.6 U1.36 | length 2306.8
  Top Layer w8: v1(2055.2,900) 2055.35,899.84 2055.35,840.67 U1.36 ; v1(2539.46,1357.28) 2580,1397.82 2580,2230 J17.6
  Bottom Layer w8: v1(2055.2,900) 2055.2,1150.2 2213.46,1308.46 2490.65,1308.46 v1(2539.46,1357.28)
PC0: J17.10 U1.8 | length 1591.9
  Top Layer w8: U1.8 2155.84,1294.23 2155.84,1328.14 v1(2172.31,1344.6) ; v1(2437.34,1479.15) 2437.34,2487.34 J17.10
  Bottom Layer w8: v1(2172.31,1344.6) 2172.41,1344.49 2353.01,1344.49 2437.34,1428.83 v1(2437.34,1479.15)
PC1: J17.11 U1.9 | length 1564.9
  Top Layer w8: U1.9 2134.25,1344.52 2145.09,1355.36 v1(2145.09,1358.6) ; v1(2414.2,1498.92) 2414.2,2514.2 2460,2560 J17.11
  Bottom Layer w8: v1(2145.09,1358.6) 2148.34,1358.6 2154.34,1364.6 2342.71,1364.6 2414.2,1436.1 v1(2414.2,1498.92)
PC2: J17.12 U1.10 | length 1560.2
  Top Layer w8: U1.10 2114.25,1292.64 2114.25,1356.05 v1(2144.36,1386.16) ; J17.12 2360,2548.43 2393.15,2515.28 v1(2393.15,1520.68)
  Bottom Layer w8: v1(2144.36,1386.16) 2145.52,1385 2334.77,1385 2393.15,1443.39 v1(2393.15,1520.68)
PC3: J17.13 U1.11 | length 1586.7
  Top Layer w8: U1.11 2096.56,1294 2096.56,1370.5 v1(2098.24,1372.18) ; J17.13 2260,2595 2365,2490 v1(2365,1545)
  Bottom Layer w8: v1(2098.24,1372.18) 2134.16,1408.1 2328.1,1408.1 2365,1445 v1(2365,1545)
PC5: J17.16 U1.25 | length 1676.8
  Top Layer w8: U1.25 1919.33,1057.72 1971.69,1057.72 v1(1972.84,1058.87) ; J17.16 1960,2010 v1(1990,1980)
  Bottom Layer w8: v1(1972.84,1058.87) 1911.83,1119.88 1911.83,1901.83 v1(1990,1980)
PC6: J17.5 U1.37 | length 2347
  Top Layer w8: U1.37 v1(2075.2,930) ; v1(2563.72,1339.15) 2620,1395.43 2620,2170 J17.5
  Bottom Layer w8: v1(2075.2,930) 2075.2,1140.2 2225,1290 2514.57,1290 v1(2563.72,1339.15)
PC7: J17.4 U1.38 | length 2387.1
  Top Layer w8: U1.38 2095.04,840.67 2095.04,899.84 v1(2095.2,900) ; v1(2589.39,1320.07) 2650,1380.68 2650,2100 J17.4
  Bottom Layer w8: v1(2095.2,900) 2095.2,1125.2 2240.05,1270.05 2541.21,1270.05 2589.39,1318.23 v1(2589.39,1320.07)
PC8: J17.3 U1.39 | length 2421.2
  Top Layer w8: U1.39 2116.09,842.03 2116.09,930 v1(2115.2,930.89) ; v1@2615,1305 2685,1375 2685,2035 J17.3
  Bottom Layer w8: v1(2115.2,930.89) 2115.2,1110.2 2257.19,1252.19 2563.33,1252.19 v1(2613.83,1302.69)
PC13: R2.1 U1.2 | length 1782.1
  Top Layer w10: U1.2 2272.95,1291.42 2272.95,1255.56 2281.52,1246.99 2319.6,1246.99 2474.45,1401.84 v1(2475.55,1401.84) ; v1(2927.37,1048.22) 3260,715.59 R2.1
  Bottom Layer w10: v1(2475.55,1401.84) 2573.75,1401.84 v1(2927.37,1048.22)
PC14: J17.8 U1.3 | length 1688.3
  Top Layer w8: U1.3 2253.71,1290.97 2253.71,1248.72 2272.97,1229.46 2332.17,1229.46 2500,1397.29 2500,2350 J17.8
PC15: J17.9 U1.4 | length 1550.1
  Top Layer w8: U1.4 2234.58,1294.23 2234.58,1334.15 2256.45,1356.02 2283.67,1356.02 2327.65,1400 2395,1400 2470,1475 2470,2420 J17.9
SPI1_CLK: U1.21 U3.13 | length 1161.5
  Top Layer w6: U1.21@1918.03,1135.16 U1.21
  Top Layer w8: U3.13 1625.33,1659.67 1603.09,1681.91 1511.91,1681.91 1453.84,1623.84 1453.84,1266.16 v1(1630,1090) ; v1(1842.18,1131.12) 1875.72,1131.12 1879.76,1135.16 U1.21@1918.03,1135.16
  Bottom Layer w8: v1(1630,1090) 1675.63,1135.63 1759.81,1135.63 1764.32,1131.12 v1(1842.18,1131.12)
SPI1_CS: U1.20 U3.12 | length 1281.2
  Top Layer w8: v1(1583.22,1089.43) 1427.35,1245.3 1427.35,1627.42 1502.92,1702.98 1612.02,1702.98 1645.02,1669.98 U3.12 ; v1(1860.34,1152.46) 1861.61,1153.73 1916.92,1153.73 U1.20
  Bottom Layer w8: v1(1583.22,1089.43) 1583.22,1092.38 1646.47,1155.63 1750.2,1155.63 1753.37,1152.46 v1(1860.34,1152.46)
SPI1_MISO: U1.22 U3.1 | length 882.3
  Top Layer w8: U3.1 1544.53,1614.53 1500,1570 1500,1299.69 1707,1092.69 1839.29,1092.69 1862.24,1115.63 U1.22
SPI1_MOSI: U1.23 U3.14 | length 1047.2
  Top Layer w8: U3.14 1605.65,1649.35 1595,1660 1525.25,1660 1477.93,1612.67 1477.93,1286.4 1693.84,1070.49 1843.52,1070.49 1868.32,1095.29 1917.53,1095.29 U1.23
SPI3_CLK: R7.2 U1.51 | length 1832.9
  Top Layer w10: U1.51 2496.04,958.15 2964.7,1426.82 2964.7,1804.7 3291,2131 3494.33,2131 R7.2
SPI3_CS: R6.2 U1.50 | length 1812
  Top Layer w10: U1.50 2370.91,939.37 2514.38,939.37 2992.01,1417 2992.01,1782.01 3290,2080 R6.2
SPI3_MISO: R8.2 U1.52 | length 1851.8
  Top Layer w10: U1.52 2370.91,978.74 2478.88,978.74 2934.29,1434.15 2934.29,1824.29 3290,2180 R8.2
SPI3_MOSI: R9.2 U1.53 | length 1867.2
  Top Layer w10: U1.53 2452.52,997.52 2905.09,1450.09 2905.09,1845.09 3290,2230 R9.2
SWCLK: J2.2 U1.49 | length 942.1
  Top Layer w10: U1.49 2370,850.69 2374.49,846.21 v1(2374.49,843.5)
  Bottom Layer w10: J2.2 2215,265 2215,685.97 2372.53,843.5 v1(2374.49,843.5)
SWDIO: J2.1 U1.46 | length 853.8
  Top Layer w10: U1.46 2253.27,839.61 2253.27,786.83 v1(2255.04,785.05)
  Bottom Layer w10: J2.1 2110,260 2110,640.01 v1(2255.04,785.05)
UART1_RX: D3.K J14.2 U1.43 | length 1067.5
  Top Layer w8: U1.43 2193.31,796.89 2185,788.58 2185,635 2385,435 2385,277.01 2427.01,235 2500,235 2548.43,283.43 J14.2
  Top Layer w15: J14.2 2550.29,296.86 2550.29,496.86 D3.K
UART1_TX: D2.K J14.1 U1.42 | length 1220.3
  Top Layer w8: U1.42 2173.62,797.01 2170,793.38 2170,620 2360,430 2360,255 2415,200 2551.85,200 J14.1
  Top Layer w15: D2.K 2644.54,496.41 2644.54,297.31 J14.1
UART2_RX: J15.2 U1.17 | length 1553.5
  Top Layer w8: U1.17 1920.09,1212.15 1950.78,1212.15 2092.93,1070 v1(2230,1070)
  Bottom Layer w8: v1(2230,1070) 2381.41,1070 2998.43,452.98 J15.2
UART2_TX: J15.1 U1.16 | length 1597
  Top Layer w8: U1.16 1998.36,1290.42 1998.36,1261.02 2097.33,1162.05 2272.95,1162.05 v1(2295,1140)
  Bottom Layer w8: v1(2295,1140) 2365,1140 3096.85,408.15 J15.1
VCC: C6.2 C7.2 C8.2 C9.2 C10.2 C11.2 C12.2 C13.2 C19.1 C20.1 J2.4 J16.3 J18.3 J18.5 J18.7 KEY1.2 R1.2 R4.2 R5.2 R10.2 R11.1 R12.1 R13.2 R14.2 R15.1 U1.1 U1.13 U1.19 U1.32 U1.48 U1.64 U2.2 U5.3 U6.3 | length 13813.7
  Top Layer w10: R15.1 991.34,774.04 1047.3,830 1091.16,873.86 C7.2 ; KEY1.2 1616.83,261.69 1539.67,338.86 R1.2 1540,340.33 v1(1540,380) 1690,530 v1(1985,530) ; v1(1802.88,1185.26) C9.2@1824.93,1185.26 ; C13.2@1819.28,900 C13.2 1876.28,900 1895.06,918.78 U1.32 ; C9.2 1834.98,1174.68 U1.19 ; v1(1886.29,1404.38) 1886.91,1405 2024.19,1405 2058.86,1370.33 C11.2 2055.51,1365.85 U1.13 ; v1(2080,530) 2160,450 J16.3 ; U1.48 2292.64,839.61 2292.64,816.48 2305.52,803.59 2305.52,751.77 C12.2@2307.53,749.76 ; U1.1 2292.64,1293.23 2292.64,1319.11 2347.59,1374.07 v1(2411.07,1374.07) ; C12.2@2317.53,734.38 C12.2 ; U1.64 2430.94,1214.06 2440,1205 C8.2 ; C8.2@2470,1195 2474.19,1195 2476.2,1192.99 2476.2,1170.62 v1(2476.58,1170.24) ; R12.1 R12.1@2555,710.05 ; v1(3460,2030) R10.2
  Top Layer w15: v1(714.63,1159.8) 714.98,1160.15 714.98,1188.51 715.33,1188.86 C20.1 715.33,1300.33 781.27,1366.27 848.16,1366.27 U6.3 ; R4.2 v1(1427.83,1915) R5.2 ; v1(2325,560) 2325.96,560.96 2356.6,560.96 2675.17,879.53 v1(2675.59,879.53) 2675.59,880.77 2969.82,1175 3160.33,1175 3200.83,1215.49 3201.97,1215.49 3210.33,1223.86 C19.1 3210.33,1279.99 3158.04,1332.28 U5.3@3132.48,1332.28 ; v1(2555.66,710.71) v1(2640.66,710.71) ; R11.1 R11.1@2640,710.05
  Bottom Layer w10: v1(1985,530) v1(2080,530) ; 2380,670.59 2420.11,710.71 v1(2555.66,710.71) ; v1(2476.58,1170.24) 2675.59,971.24 v1(2675.59,879.53) ; 2478.5,1441.5 3067,2030 v1(3460,2030)
  Bottom Layer w15: v1(714.63,1159.8) 904.43,970 v1(1095,970) ; 895,1915 v1(1427.83,1915) ; v1(1200,965) 1201.35,965 1212.05,975.7 1225.1,975.7 1668.09,1418.69 1808.69,1418.69 1860,1470 1860,1945 1970,2055 2115,2055 2478.5,1691.5 2478.5,1441.5 v1(2411.07,1374.07) ; v1(1210,905) 1300,905 1365,840 1757.97,840 v1(1818.63,900.66) ; v1(1210,935) 1210.48,935.48 1225.48,935.48 1520,1230 1758.14,1230 v1(1802.88,1185.26) ; 1225,955 1674.38,1404.38 v1(1886.29,1404.38) ; v1(1540,380) 1645,275 1691.21,275 1915.37,50.83 2200.83,50.83 J2.4 2325,175 2325,565 2380,620 2380,670.59 v1(2316.87,733.72)
  Bottom Layer w20: v1(1210,870) 1395,685 1395,400 1445,350 1510,350 v1(1540,380)
  other v1: 1130,870 1165,870 1130,905 1165,905 1130,935 1165,935 1130,970 1165,970
pads on no net: J3.1 J4.2 J4.4 U1.54 U1.55 U1.56 U1.57 U1.61 U1.62 U3.9 U4.4 U5.5 U5.8 U6.5 U6.8
copper on no net:
  other v2: 1475,180 1545,180 1645,180 1715,180

## Polygon pours and split planes (outlines as drawn)
GND on Top Layer "GND_L01_P005" (solid, remove dead copper, pour order 5): 70,2695 20,2645 20,70 65,25 3925,25 3960,60 3960,2655 3920,2695
VCC on Top Layer "VCC_L01_P002" (solid, remove dead copper, pour order 2): 1090,510 1115,485 1160,485 1195,520 1195,675 1220,700 1220,960 1200,980 1080,980 1065,965 1065,700 1090,675
GND on Top Layer "GND_L01_P001" (solid, remove dead copper, pour order 1): 1105,300 1130,325 1130,450 1080,500 1080,590 1070,600 1035,600 1020,585 1020,325 1045,300
+5 on Top Layer "+5_L01_P000" (solid, remove dead copper, pour order 0): 1145,325 1170,300 1235,300 1265,330 1265,590 1255,600 1215,600 1205,590 1205,510 1145,450 1145,390
GND on Bottom Layer "GND_L02_P008" (solid, remove dead copper, pour order 8): 70,2695 20,2645 20,70 65,25 3925,25 3960,60 3960,2655 3920,2695
VCC on Bottom Layer "VCC_L02_P006" (solid, remove dead copper, pour order 6): 1060.46,846.58 1062.04,845 1235,845 1235,1700 1170,1765 1030,1765 965,1830 965,2530 940,2555 690,2555 645,2510 645,1645 1100,1645 1140,1605 1140,1085 1060,1005 1060,870
+5 on Bottom Layer "+5_L02_P003" (solid, remove dead copper, pour order 3): 1190,450 1215,425 1280,425 1305,450 1305,520 1280,545 1210,545 1190,525

## Silkscreen, mask and mechanical layers (free items; w line width, h text height)
Top Overlay:
  drawing of 46 lines, arcs and shapes, not listed
  text "GND" at 1005,2575 h40 r90
  text "GND" at 1035,2575 h40 r90
  text "GND" at 1065,2575 h40 r90
  text "GND" at 1094.12,2575 h40 r90
  text "+5V" at 1001.61,2475 h40 r90
  text "VCC" at 1032.45,2475 h40 r90
  text "VCC" at 1063.28,2475 h40 r90
  text "VCC" at 1094.12,2475 h40 r90
  text "PB2" at 1675.91,2459.55 h40 r90
  text "PB1" at 1775.92,2459.55 h40 r90
  text "PB0" at 1875.92,2459.55 h40 r90
  text "PC5" at 1975.92,2459.55 h40 r90
  text "PA1" at 2075.92,2459.55 h40 r90
  text "PA0" at 2175.92,2459.55 h40 r90
  text "PC3" at 2275.92,2459.55 h40 r90
  text "PC2" at 2375.92,2459.55 h40 r90
  text "PC1" at 2475.92,2459.55 h40 r90
  text "PC0" at 2575.92,2459.55 h40 r90
  text "PC15" at 2675.92,2459.55 h40 r90
  text "PC14" at 2775.92,2459.55 h40 r90
  text "PB14" at 2875.92,2459.55 h40 r90
  text "PB15" at 2975.92,2459.55 h40 r90
  text "PC6" at 3075.91,2459.55 h40 r90
  text "PC7" at 3175.91,2459.55 h40 r90
  text "PC8" at 3275.91,2459.55 h40 r90
  text "PA9" at 3375.91,2459.55 h40 r90
  text "PA8" at 3475.91,2459.55 h40 r90
  text "SPI3" at 3560.3,2280.4 h80
  text "MOSI" at 3589.94,2204.09 h40
  text "MISO" at 3589.94,2165.23 h40
  text "IMU" at 1000,2138.11 h120
  text "CLK" at 3589.94,2126.37 h40
  text "CS" at 3589.94,2087.51 h40
  text "H" at 399.09,1895.31 h40 r270
  text "L" at 3585.91,1867.91 h40 r90
  text "L" at 399.09,1790.31 h40 r270
  text "H" at 3585.91,1762.91 h40 r90
  text "VCC" at 1140,1739.09 h40
  text "GND" at 1240,1739.09 h40
  text "SCL" at 1345,1739.16 h40
  text "SDA" at 1440.33,1739.16 h40
  text "INT" at 1650,1739.09 h40
  text "I2C1" at 1345,1677.6 h100
  text "H" at 399.09,1576.87 h40 r270
  text "L" at 3585.91,1549.47 h40 r90
  text "L" at 399.09,1471.87 h40 r270
  text "H" at 3585.91,1444.47 h40 r90
  text "CAN2" at 448.93,1265 h250 r270
  text "H" at 399.09,1258.44 h40 r270
  text "L" at 3585.91,1231.03 h40 r90
  text "L" at 399.09,1153.44 h40 r270
  text "H" at 3585.91,1126.03 h40 r90
  text "H" at 399.09,940 h40 r270
  text "L" at 3585.91,912.6 h40 r90
  text "L" at 399.09,835 h40 r270
  text "H" at 3585.91,807.6 h40 r90
  text "CAN1" at 3527.74,725.95 h250 r90
  text "POWER" at 906.9,550 h80 r90
  text "I2C2" at 1938.74,398.6 h80
  text "-" at 1073.43,378.49 h60
  text "+" at 1175,377.36 h40
  text "GND" at 2415,374.09 h40
  text "RX1" at 2513.43,374.09 h40
  text "TX1" at 2610,374.09 h40
  text "GND" at 2865,374.09 h40
  text "RX2" at 2963.43,374.09 h40
  text "TX2" at 3060,374.09 h40
  text "SDA" at 2009.98,369.24 h40
  text "VCC" at 2120,369.09 h40
  text "GND" at 2220,369.09 h40
  text "SCL" at 1938.74,368.34 h40
  text "DIO" at 1930,159.09 h40
  text "CLK" at 2025,159.09 h40
  text "GND" at 2120,159.09 h40
  text "VCC" at 2220,159.09 h40
  text "nRST" at 1436.9,95 h80 r90
  text "Boot0" at 1801.9,85 h80 r90
  text "TEST_LED" at 3358.34,65 h80 r90
  text "VIN" at 988.34,41.88 h200 r90
Board Layer Stack Bottom Overlay:
  drawing of 54 lines, arcs and shapes, not listed
  text "Motor Control Board" at 2409.93,1644.9 h100
  text "v1.0" at 1500,1644.35 h40
  text "High Performance MCU" at 2305,1577.45 h50
  text "STM32F405" at 1795,1572.45 h50
  text "SPI and I2C" at 2305,1514.37 h50
  text "Supported" at 2040,1512.45 h50
  text "NOTES:" at 1410,1480.04 h100
  text "up tp 8 CAN Bus Ports" at 2010,1452.45 h50
  text "CAN/FD CAN" at 2305,1451.33 h50
  text "6-axis IMU" at 2305,1388.67 h50
  text "Onboard" at 2070,1387.45 h50
  text "by" at 2923.45,693.36 h40
  text "Designed" at 3148.45,691.9 h50
  text "Yue Wang" at 3223.5,619.07 h70
  text "UoS" at 2893.42,616.38 h50
  text "01/02/2024" at 2943.45,557.95 h40
Mechanical 1:
  the board outline again, w3.94

## Text inside footprints (layer, text, board x,y; h text height)
J14: Top Overlay "5264" at 2652.43,205.35 h30 r180
J15: Top Overlay "5264" at 3102.42,205.35 h30 r180